# Altium PCB Plumo-2D.PcbDoc (part 1 of 2)
Units mil, origin at the board's own origin, x right, y up, seen from the top; angles counter-clockwise.
Board outline 2000 x 900 mil, 4 copper layers (Top Layer, Signal Layer 1, Signal Layer 2, Bottom Layer), stack 64.618 mil thick; 97 components, 64 nets, 298 pads, 130 vias.
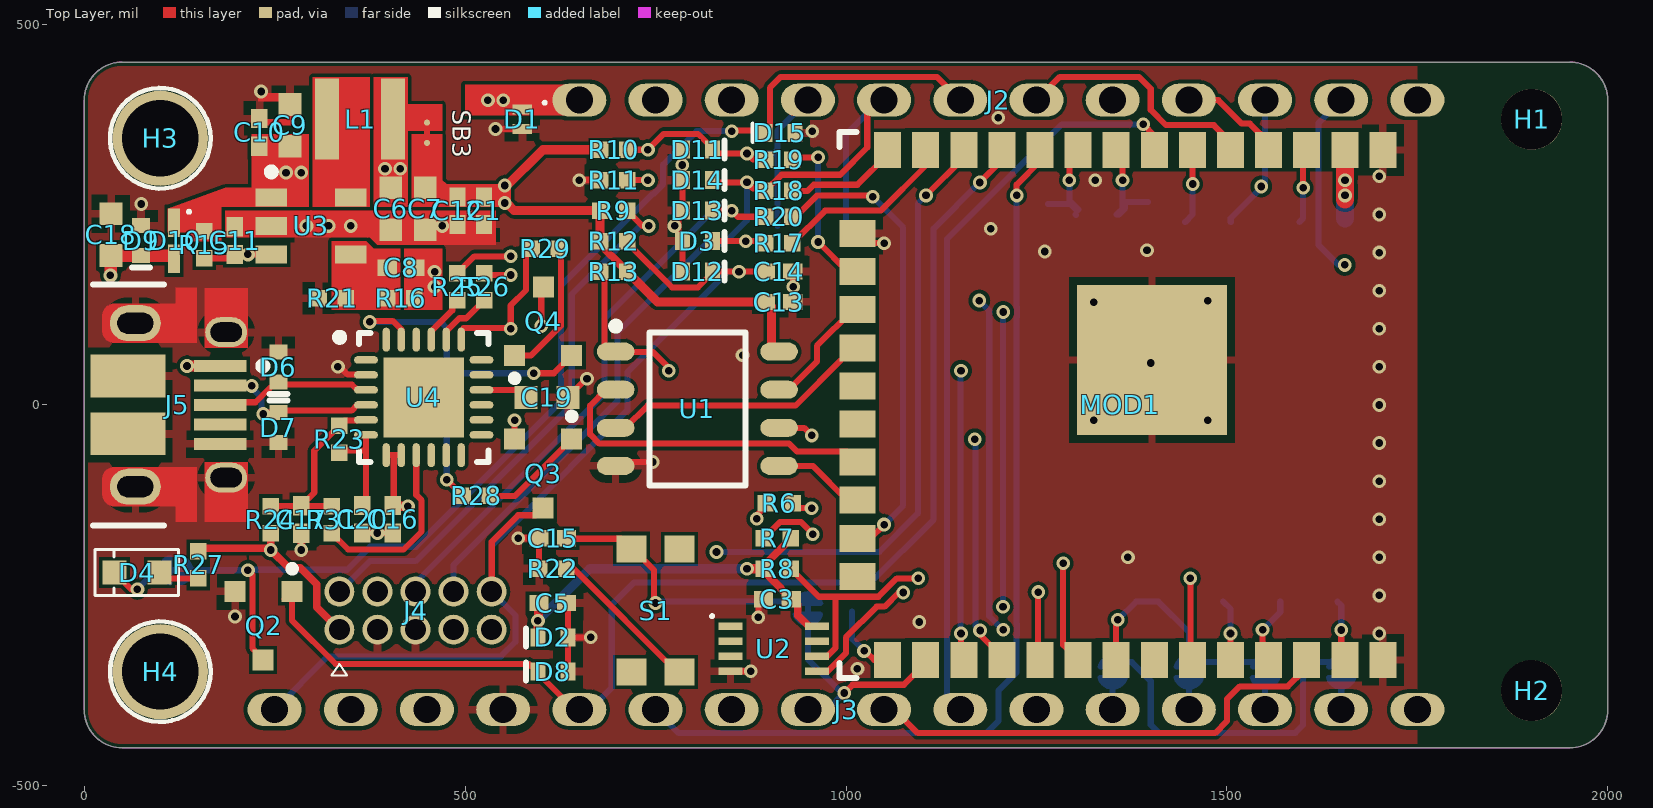
[diagram p0: Top Layer view]
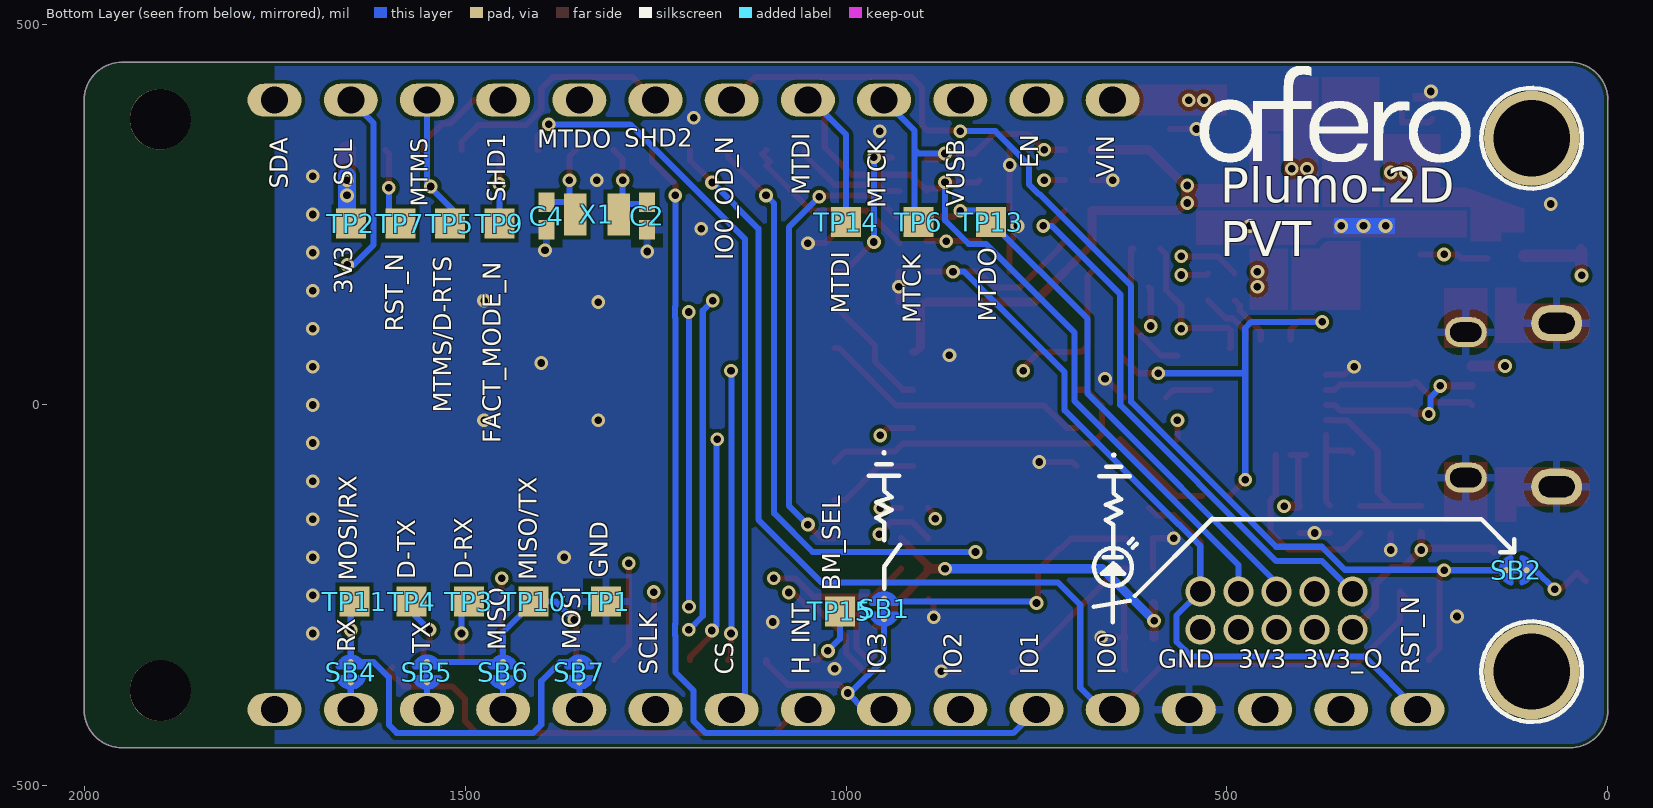
[diagram p1: Bottom Layer view, seen from below]
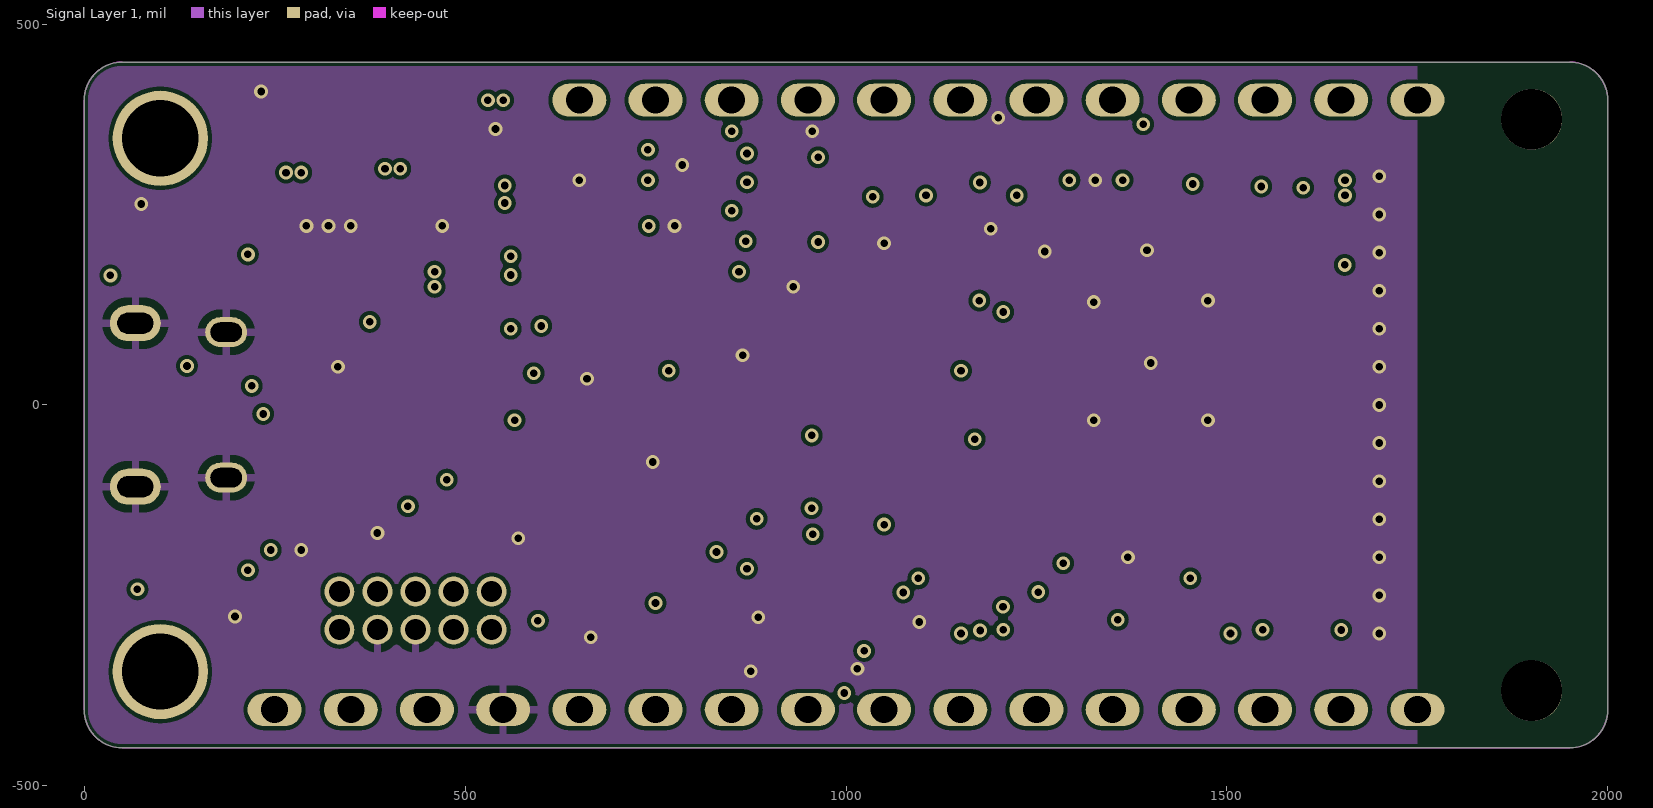
[diagram p2: Signal Layer 1]
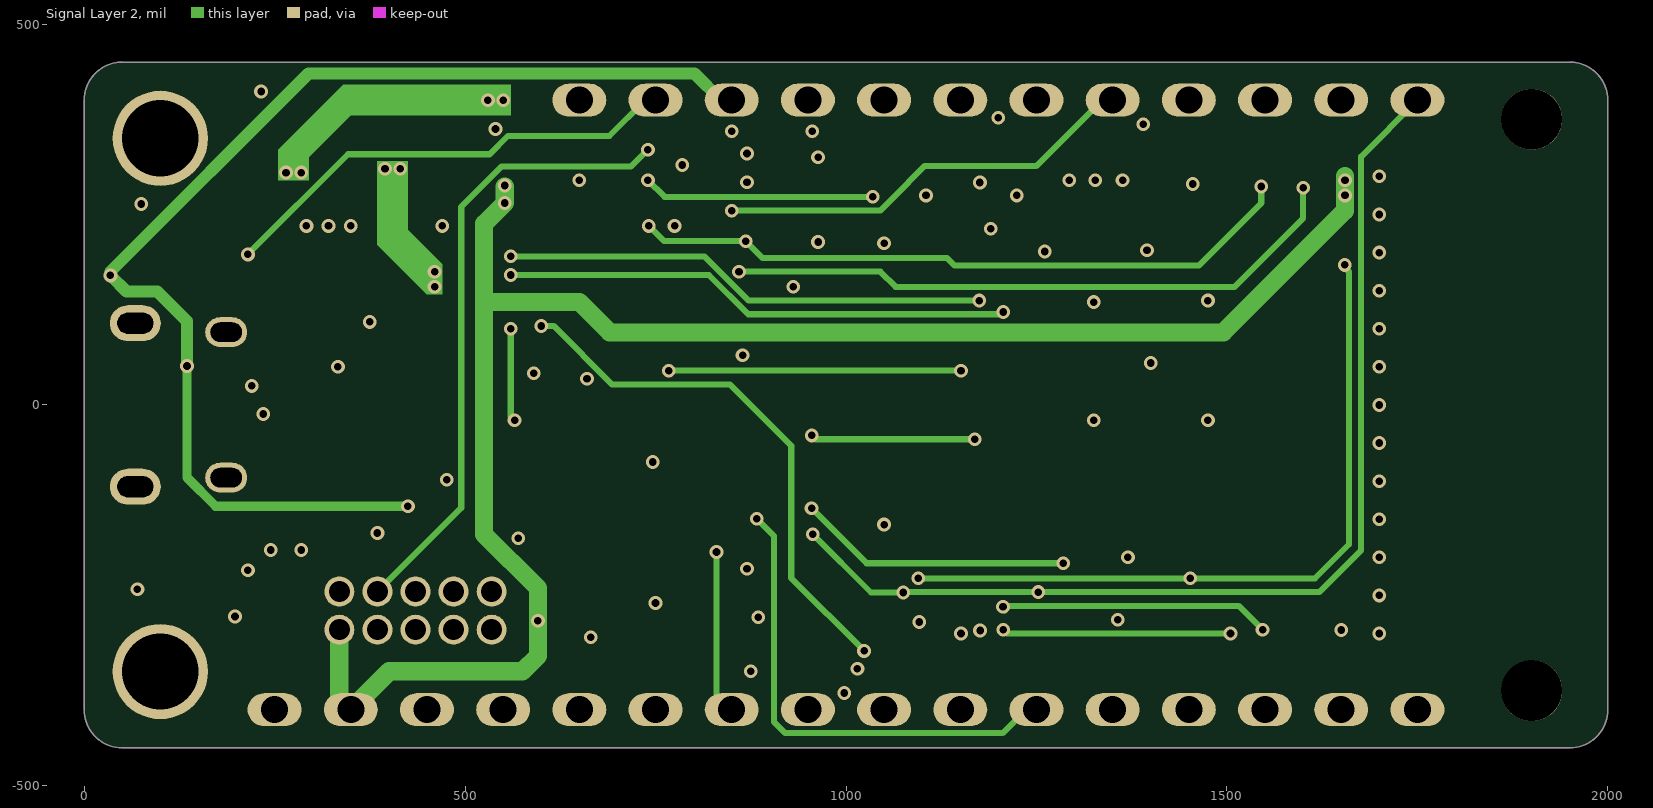
[diagram p3: Signal Layer 2]
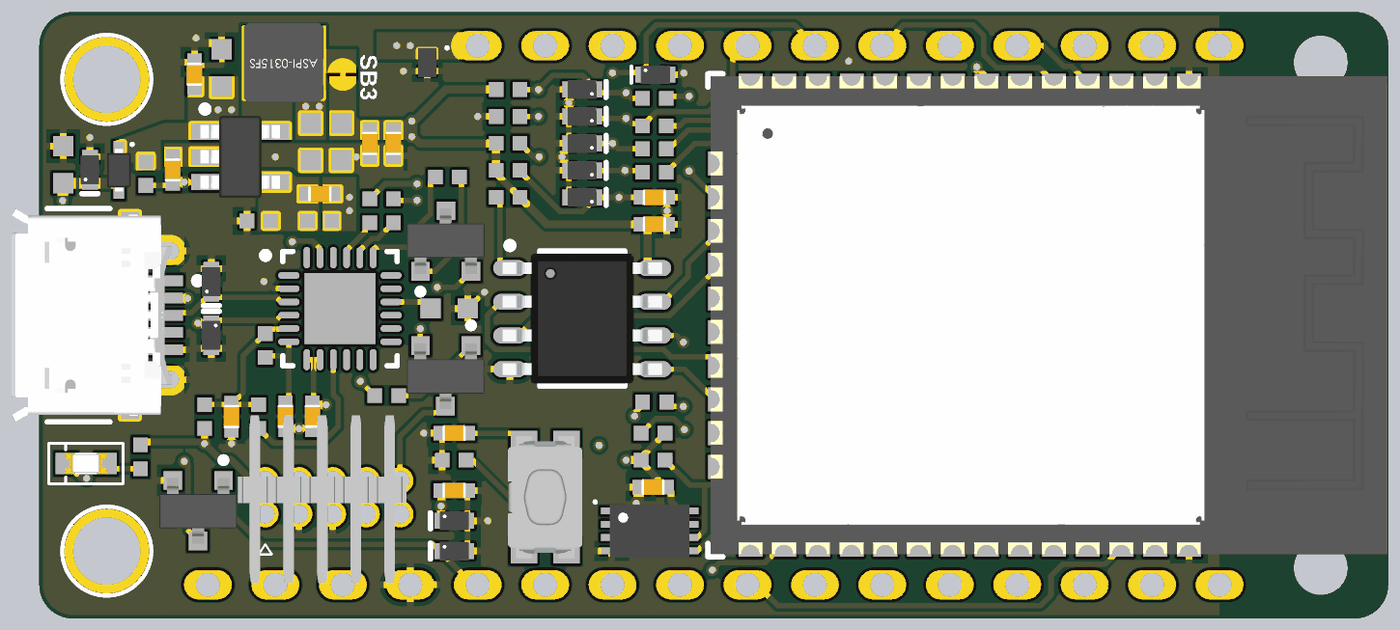
[diagram p5: 3D render of the assembled board from above, using the file's embedded part models]

## Layer stack, top to bottom
Top Solder: solder mask 0.4, Solder Resist, Dk 3.5
Top Layer: signal copper 1.4
Dielectric 1: core 6.7, FR408, Dk 4.2
Signal Layer 1: signal copper 0.709
Dielectric 3: prepreg 47, FR408, Dk 4.2
Signal Layer 2: signal copper 0.709
Dielectric 2: core 6.7, FR408, Dk 4.2
Bottom Layer: signal copper 1.4
Bottom Solder: solder mask 0.4, Solder Resist, Dk 3.5

## Board outline
0,-400 0,400 cw(c50,400) 50,450 1950,450 cw(c1950,400) 2000,400 2000,-400 cw(c1950,-400) 1950,-450 50,-450 cw(c50,-400)

## Design rules (kind name [scope] priority, off if disabled: settings)
Clearance [(Name <> 'H1-H') and (Name <> 'H2-H') vs (Name <> 'H1-H') and (Name <> 'H2-H')] p1: gap=5 ignorepadtopadclearanceinfootprint=FALSE
ComponentClearance [All] p1 off: gap=0 collisioncheckmode=3 verticalgap=0 showdistances=FALSE
DiffPairsRouting [All] p1 off: maxlimit=10 minlimit=5 mostfreqgap=5 toplayer_minwidth=8 toplayer_maxwidth=15 toplayer_prefwidth=8 midlayer1_minwidth=8 midlayer1_maxwidth=15 midlayer1_prefwidth=8 midlayer2_minwidth=8 midlayer2_maxwidth=15 midlayer2_prefwidth=8 bottomlayer_minwidth=8 bottomlayer_maxwidth=15 bottomlayer_prefwidth=8 maxuncoupledlength=500
MinimumSolderMaskSliver [All] p1 off: minsoldermaskwidth=10
PolygonConnect antenna-gnd-connect [IsVia vs IsPolygon] p1: connectstyle=Direct reliefconductorwidth=10 reliefentries=4 polygonreliefangle="90 Angle" airgapwidth=10
PolygonConnect PolygonConnect_1 [All] p2: connectstyle=Relief reliefconductorwidth=10 reliefentries=4 polygonreliefangle="90 Angle" airgapwidth=10
RoutingPriority "3V3 Routing" [InNet('3V3')] p1: routingpriority=89
RoutingPriority "GND Routing" [InNet('GND')] p2: routingpriority=90
RoutingVias [All] p1: holewidth=10 width=18 viastyle="Through Hole" minholewidth=10 minwidth=18 maxholewidth=20 maxwidth=40
SilkToSilkClearance [All] p1 off: silktosilkclearance=10
SilkToSolderMaskClearance [IsPad] p1 off: minsilkscreentomaskgap=10 clearancetoexposedcopper=TRUE
SolderMaskExpansion [All] p1: expansion=4
Width [All] p1: maxlimit=30 minlimit=5 preferedwidth=8
24 further rules are at their usual default settings.

## Classes and differential pairs
differential pair USB: +USB_P -USB_N

## Components (designator, comment, footprint, x,y, rotation, side; value= is the part's Value field where it differs from the comment)
C1 "100nF" 0402C-GENERIC 525,255 r270 top
C2 "18pF" 0402C-GENERIC 1261,248 r270 bottom
C3 "100nF" 0402C-GENERIC 910,-255 r180 top
C4 "18pF" 0402C-GENERIC 1393,248 r270 bottom
C5 "1uF" 0402C-GENERIC 615,-260 r0 top value=1u
C6 "10uF" 0603C-GENERIC 402.4,285 r270 top value=10u
C7 "10uF" 0603C-GENERIC 447.83,285 r270 top value=10u
C8 "20pF" 0402C-GENERIC 415.95,180 r180 top
C9 "2.2uF" 0603C-GENERIC 270.39,339.57 r90 top value=2u2
C10 "100nF" 0402C-GENERIC 230,357.68 r90 top
C11 "100nF" 0402C-GENERIC 197.83,215.71 r90 top
C12 "1uF" 0402C-GENERIC 490,255 r270 top value=1u
C13 "100nF" 0402C-GENERIC 912,135 r0 top
C14 "1uF" 0402C-GENERIC 912,175 r0 top value=1u
C15 "100nF" 0402C-GENERIC 615,-175 r180 top
C16 "1uF" 0402C-GENERIC 405,-150 r270 top value=1u
C17 "100nF" 0402C-GENERIC 285,-150.39 r270 top
C18 "4.7uF" 0603C-GENERIC 35.27,196 r90 top value=4u7
C19 "4.7uF" 0603C-GENERIC 580,10 r0 top value=4u7
C20 "1uF" 0402C-GENERIC 365,-150 r270 top value=1u
D1 "SP3118-01ETG" SOD882 575,375 r270 top
D2 "TPD1E05U06" SON70P100X45-2N 595.63,-305 r0 top
D3 "TPD1E05U06" SON70P100X45-2N 824.57,215 r180 top
D4 "Orange" 0603LED 99.06,-220 r180 top
D6 "TPD1E05U06" SON70P100X45-2N 255,30 r90 top
D7 "TPD1E05U06" SON70P100X45-2N 255,-10 r270 top
D8 "TPD1E05U06" SON70P100X45-2N 595.63,-350 r0 top
D9 "TPD1E05U06" SON70P100X45-2N 75,196.13 r90 top
D10 "NSR05T30XV2T5G" SOD-523 118,215.2 r270 top
D11 "TPD1E05U06" SON70P100X45-2N 824.57,335 r180 top
D12 "TPD1E05U06" SON70P100X45-2N 824.57,175 r180 top
D13 "TPD1E05U06" SON70P100X45-2N 824.57,255 r180 top
D14 "TPD1E05U06" SON70P100X45-2N 824.57,295 r180 top
D15 "TPD1E05U06" SON70P100X45-2N 893.58,357 r0 top
H1 "FEATHER-HOLE-NP" FEATHER-HOLE-NP 1900,375 r0 top
H2 "FEATHER-HOLE-NP" FEATHER-HOLE-NP 1900,-375 r0 top
H3 "FEATHER-HOLE-P" FEATHER-HOLE-P 100,350 r0 top
H4 "FEATHER-HOLE-P" FEATHER-HOLE-P 100,-350 r0 top
J2 "HDR-1x12" HDR-1X12 650,400 r0 top
J3 "HDR-1x16" HDR-1X16 1750,-400 r180 top
J4 "HDR-2x5" S9015E-05 435,-270 r0 top
J5 "10103594-0001LF" 10103594-0001LF 122,0 r180 top locked
L1 "10uH" ASPI-0315FS 319,375 r0 top
MOD1 "ESP32-WROOM-32D" ESP32-WROOM-32D 1359.95,0 r270 top locked
Q2 "2N7002" SOT23 273,-245 r270 top
Q3 "MMBT3904" SOT23 640,-45 r270 top
Q4 "MMBT3904" SOT23 565,65 r90 top
R6 "100" 0402R-GENERIC 912.28,-128.78 r0 top
R7 "4.7k" 0402R-GENERIC 910,-175 r180 top
R8 "4.7k" 0402R-GENERIC 910,-215 r0 top
R9 "100k" 0402R-GENERIC 695,255 r0 top
R10 "100k" 0402R-GENERIC 695,335 r0 top
R11 "NS" 0402R-GENERIC 695,295 r180 top
R12 "10k" 0402R-GENERIC 695,215 r180 top
R13 "10k" 0402R-GENERIC 695,175 r180 top
R15 "200K" 0402R-GENERIC 157.83,210.32 r270 top
R16 "680k" 0402R-GENERIC 415.55,140 r0 top
R17 "100" 0402R-GENERIC 912,212 r0 top
R18 "100" 0402R-GENERIC 912,281 r0 top
R19 "100" 0402R-GENERIC 912,322 r0 top
R20 "100" 0402R-GENERIC 912,247 r0 top
R21 "200k" 0402R-GENERIC 325.55,140 r0 top
R22 "100" 0402R-GENERIC 615,-215 r180 top
R23 "0" 0402R-GENERIC 335,-45 r270 top
R24 "NS" 0402R-GENERIC 245,-150.39 r90 top
R25 "1k" 0402R-GENERIC 490,155 r270 top
R26 "1k" 0402R-GENERIC 525,155 r270 top
R27 "1k" 0402R-GENERIC 150,-210 r90 top
R28 "10k" 0402R-GENERIC 515,-119.31 r0 top
R29 "10k" 0402R-GENERIC 605,205 r0 top
R31 "4.7k" 0402R-GENERIC 325,-150.39 r90 top
S1 "KMR231NGLFS" KMR231NGLFS 750,-270 r270 top locked
SB1 "Solderbridge" SBNC 950,-267.64 r90 bottom net-tie
SB2 "Solderbridge" SBNC 120,-216.91 r180 bottom net-tie
SB3 "Solderbridge" SBNC 450.1,357.28 r90 top net-tie
SB4 "Solderbridge" SBNC 1650,-350.71 r90 bottom net-tie
SB5 "Solderbridge" SBNC 1550,-350.71 r90 bottom net-tie
SB6 "Solderbridge" SBNC 1450,-350.71 r90 bottom net-tie
SB7 "Solderbridge" SBNC 1350,-350.71 r90 bottom net-tie
TP1 "TP1MM" TP1MM 1315,-258 r90 bottom
TP2 "TP1MM" TP1MM 1650,238 r90 bottom
TP3 "TP1MM" TP1MM 1495,-258 r90 bottom
TP4 "TP1MM" TP1MM 1570,-258 r90 bottom locked
TP5 "TP1MM" TP1MM 1520,238 r90 bottom
TP6 "TP1MM" TP1MM 905,240 r90 bottom
TP7 "TP1MM" TP1MM 1585,238 r90 bottom locked
TP9 "TP1MM" TP1MM 1455,238 r90 bottom
TP10 "TP1MM" TP1MM 1410,-258 r90 bottom
TP11 "TP1MM" TP1MM 1645,-258 r90 bottom
TP13 "TP1MM" TP1MM 810,240 r90 bottom
TP14 "TP1MM" TP1MM 1000,240 r90 bottom
TP15 "TP1MM" TP1MM 1008,-271 r90 bottom locked
U1 "IPS6404L-SQ" IPUS.PSRAM 805,-5 r0 top
U2 "ATECC508A" SON50P300X60-8N 905,-320 r0 top
U3 "XC9264B755MR" SOT95P275X130-5N 297.83,235 r0 top
U4 "CP2104" CP2104 445.79,9.84 r0 top locked
X1 "32.768kHz" ABS06 1355.41,250 r180 bottom

## Footprints (in the part's own frame and the unit in brackets; to place one, negate y for a bottom-side part, rotate by r counter-clockwise, add the part's x,y. Pads: shape width x height; smd on the part's side, far side on the other; paste and mask are expansions set on the pad)
0402C-GENERIC [mm] "Chip Capacitor, 2-Leads, Body 1.00x0.50mm, IPC High Density"
  rect 0.64x0.54 smd: 1(-0.46,0) 2(0.46,0)
  body extent -0.45,-0.3 0.45,0.3, height 0.55
0402R-GENERIC [mm] "Chip Resistor, 2-Leads, Body 1.00x0.50mm, IPC Medium Density"
  rect 0.55x0.55 smd: 1(-0.45,0) 2(0.45,0)
  body extent -0.53,-0.27 0.53,0.28, height 0.4
0603C-GENERIC [mil] "CAPACITOR 0603"
  rect 30x30 smd: 1(0,0) 2(55,0)
  body extent -4,-15 59,15, height 19
0603LED [mm] "0603 LED"
  rect 0.8x0.8 smd: A(0,0) K(1.5,0)
  silkscreen extent -0.64,-0.76 2.16,0.76, body extent -0.04,-0.4 1.56,0.4, height 0.6
10103594-0001LF [mm] "USB Micro B"
  rect 1.75x0.4 smd: 1(-1.435,-1.3) 2(-1.435,-0.65) 3(-1.435,0) 4(-1.435,0.65) 5(-1.435,1.3)
  oval 1.4x1 hole 0.65 slot 1.05 at 0 deg: 6(-1.64,-2.425) 7(-1.64,2.425)
  oval 1.7x1.2 hole 0.7 slot 1.2 at 0 deg: 8(1.39,2.725) 9(1.39,-2.725)
  rect 2.5x1.425 smd: 10(1.64,-0.963) 11(1.64,0.963)
  Top Layer region: -2.37,3.9 -2.37,1.9 -0.91,1.9 -0.91,3.9
  Top Layer region: -0.91,-3.9 -0.91,-1.9 -2.37,-1.9 -2.37,-3.9
  Top Layer region: 0.04,3.375 2.09,3.375 2.129,3.373 2.167,3.369 2.185,3.365 2.203,3.359 2.239,3.348 2.277,3.329 2.312,3.308 2.344,3.284 2.374,3.258 2.401,3.227 2.426,3.194 2.446,3.158 2.464,3.121 2.477,3.08 2.483,3.049 2.488,3.012 2.49,2.975 2.49,2.475 2.488,2.432 2.481,2.391 2.471,2.351 2.456,2.312 2.439,2.28 2.421,2.249 2.396,2.217 2.37,2.19 2.342,2.164 2.312,2.143 2.277,2.121 2.241,2.105 2.209,2.093 2.192,2.088 2.175,2.084 2.155,2.08 2.134,2.076 2.112,2.075 2.09,2.075 0.04,2.075 -0.66,2.075 -0.66,3.9 0.04,3.9
  Top Layer region: 0.04,-3.375 2.09,-3.375 2.129,-3.373 2.167,-3.369 2.185,-3.365 2.203,-3.359 2.239,-3.348 2.277,-3.329 2.312,-3.308 2.344,-3.284 2.374,-3.258 2.401,-3.227 2.426,-3.194 2.446,-3.158 2.464,-3.121 2.477,-3.08 2.483,-3.049 2.488,-3.012 2.49,-2.975 2.49,-2.475 2.488,-2.432 2.482,-2.391 2.471,-2.351 2.456,-2.312 2.439,-2.28 2.421,-2.249 2.397,-2.217 2.37,-2.19 2.342,-2.164 2.312,-2.143 2.277,-2.121 2.241,-2.105 2.209,-2.093 2.192,-2.088 2.175,-2.084 2.155,-2.08 2.134,-2.076 2.112,-2.075 2.09,-2.075 0.04,-2.075 -0.66,-2.075 -0.66,-3.9 0.04,-3.9
  silkscreen extent -2.99,-4.02 2.8,4.02, body extent -1.88,-4.02 4.15,4.02, height 2.9
ABS06 [mm]
  rect 0.75x1.4 smd: 1(0,0) 2(1.45,0)
  body extent -0.3,-0.61 1.7,0.61, height 0.61
ASPI-0315FS [mm] "LOW PROFILE SHIELDED SMD CHIP POWER INDUCTOR"
  rect 0.8x2.7 smd: 1(0,0) 2(2.2,0)
  body extent -0.4,-1.5 2.6,1.5, height 1.51
CP2104 [mm] "CP2104 4x4mm QFN"
  oval 0.8x0.25 smd: 1(-1.925,1.25) 2(-1.925,0.75) 3(-1.925,0.25) 4(-1.925,-0.25) 5(-1.925,-0.75) 6(-1.925,-1.25) 13(1.925,-1.25) 14(1.925,-0.75) 15(1.925,-0.25) 16(1.925,0.25) 17(1.925,0.75) 18(1.925,1.25)
  oval 0.25x0.8 smd: 7(-1.25,-1.925) 8(-0.75,-1.925) 9(-0.25,-1.925) 10(0.25,-1.925) 11(0.75,-1.925) 12(1.25,-1.925) 19(1.25,1.925) 20(0.75,1.925) 21(0.25,1.925) 22(-0.25,1.925) 23(-0.75,1.925) 24(-1.25,1.925)
  rect 2.68x2.68 smd: 25(0,0)
  silkscreen extent -2.93,-2.15 2.15,2.15, body extent -2,-2 2,2, height 0.8
ESP32-WROOM-32D [mm]
  rect 1.2x0.9 smd: 1(-8.5,8.755) 2(-8.5,7.485) 3(-8.5,6.215) 4(-8.5,4.945) 5(-8.5,3.675) 6(-8.5,2.405) 7(-8.5,1.135) 8(-8.5,-0.135) 9(-8.5,-1.405) 10(-8.5,-2.675) 11(-8.5,-3.945) 12(-8.5,-5.215) 13(-8.5,-6.485) 14(-8.5,-7.755) 25(8.5,-7.755) 26(8.5,-6.485) 27(8.5,-5.215) 28(8.5,-3.945) 29(8.5,-2.675) 30(8.5,-1.405) 31(8.5,-0.135) 32(8.5,1.135) 33(8.5,2.405) 34(8.5,3.675) 35(8.5,4.945) 36(8.5,6.215) 37(8.5,7.485) 38(8.5,8.755)
  rect 0.9x1.2 smd: 15(-5.715,-8.755) 16(-4.445,-8.755) 17(-3.175,-8.755) 18(-1.905,-8.755) 19(-0.635,-8.755) 20(0.635,-8.755) 21(1.905,-8.755) 22(3.175,-8.755) 23(4.445,-8.755) 24(5.715,-8.755)
  rect 5x5 smd: 39(-1.5,1.055)
  silkscreen extent -9.1,-9.37 9.1,-8.8, body extent -9,-9.27 9,16.23, height 3.26
FEATHER-HOLE-NP [mil] "Feather Board Hole not Plated"
  round 80 hole 80 unplated paste-39.37 mask-39.37: H(0,0)
FEATHER-HOLE-P [mil] "Feather Board Hole Plated"
  round 125 hole 100 paste-39.37: H(0,0)
  silkscreen extent -66,-66 66,66
HDR-1X12 [mm] "Machine Pin Vertical Male Header 12 pins"
  oval 1.8x1.1 hole 0.9: 1(0,0) 2(2.54,0) 3(5.08,0) 4(7.62,0) 5(10.16,0) 6(12.7,0) 7(15.24,0) 8(17.78,0) 9(20.32,0) 10(22.86,0) 11(25.4,0) 12(27.94,0)
HDR-1X16 [mm] "Machine Pin Vertical Male Header 18 pins"
  oval 1.8x1.1 hole 0.9: 1(0,0) 2(2.54,0) 3(5.08,0) 4(7.62,0) 5(10.16,0) 6(12.7,0) 7(15.24,0) 8(17.78,0) 9(20.32,0) 10(22.86,0) 11(25.4,0) 12(27.94,0) 13(30.48,0) 14(33.02,0) 15(35.56,0) 16(38.1,0)
IPUS.PSRAM [mm] "SOP, 8-Leads, Body 4.90x3.90mm, Pitch 1.27mm, IPC Medium Density"
  oval 1.25x0.6 smd: 1(-2.725,1.905) 2(-2.725,0.635) 3(-2.725,-0.635) 4(-2.725,-1.905) 5(2.725,-1.905) 6(2.725,-0.635) 7(2.725,0.635) 8(2.725,1.905)
  silkscreen extent -2.85,-2.55 1.6,2.88, body extent -3,-2.45 3,2.45, height 1.7
KMR231NGLFS [mm] "Microminiature Tact Switch for SMT"
  rect 0.9x1 smd: 1(-2.05,-0.8) 2(-2.05,0.8) 3(2.05,-0.8) 4(2.05,0.8)
  body extent -2.3,-1.4 2.3,1.4, height 1.93
S9015E-05 [mm] ".050\" Dual Row Male Header"
  round 1 hole 0.7: 1(-2.54,-0.635) 2(-2.54,0.635) 3(-1.27,-0.635) 4(-1.27,0.635) 5(0,-0.635) 6(0,0.635) 7(1.27,-0.635) 8(1.27,0.635) 9(2.54,-0.635) 10(2.54,0.635)
  silkscreen extent -2.79,-2.16 -2.29,-1.78, body extent -3.17,-1.7 3.17,1.7, height 4.01
SBNC [mm] "Solderbridge, Normally Closed"
  round 0.2 smd paste-10: 1(-0.338,0) 2(0.338,0)
  Top Layer region: -0.102,-0.432 -0.178,-0.505 -0.296,-0.467 -0.361,-0.424 -0.434,-0.351 -0.488,-0.292 -0.546,-0.193 -0.574,-0.099 -0.569,0.122 -0.544,0.193 -0.46,0.33 -0.376,0.411 -0.284,0.469 -0.183,0.5 -0.132,0.483 -0.102,0.43
  Top Layer region: 0.102,0.432 0.178,0.505 0.296,0.467 0.361,0.424 0.434,0.351 0.488,0.292 0.546,0.193 0.574,0.099 0.569,-0.122 0.544,-0.193 0.46,-0.33 0.376,-0.411 0.284,-0.469 0.183,-0.5 0.132,-0.483 0.102,-0.43
  Top Layer lines w0.152: -0.178,-0.431 cw(c-0.068,0) -0.178,0.431 ; 0.178,-0.431 ccw(c0.068,0) 0.178,0.431
  Top Layer lines w0.203: -0.338,0 0.338,0
SOD882 [mm] "SOD 2-Leads, Body 0.60x1.00mm, Pitch 0.65mm, IPC Medium Density"
  rect 0.325x0.65 smd: 1(-0.325,0) 2(0.325,0)
  silkscreen extent -0.6,0.7 -0.5,0.8, body extent -0.55,-0.35 0.55,0.35, height 0.6
SOD-523 [mm] "SODFL, 2-Leads, Body 0.80x1.60mm, IPC Medium Density"
  rect 0.95x0.4 smd: 1(-0.6,0) 2(0.6,0)
  silkscreen extent -1.02,0.45 -0.93,0.55, body extent -0.8,-0.45 0.8,0.45, height 0.7
SON50P300X60-8N [mm] "SON, 8-Leads, Body 2.00x3.00mm, Pitch 0.50mm, IPC Medium Density"
  rect 0.8x0.25 smd: 1(-1.44,0.75) 2(-1.44,0.25) 3(-1.44,-0.25) 4(-1.44,-0.75) 5(1.44,-0.75) 6(1.44,-0.25) 7(1.44,0.25) 8(1.44,0.75)
  silkscreen extent -2.1,1.04 -2,1.14, body extent -1.5,-1 1.5,1, height 0.6
SON70P100X45-2N [mm] "SON, 2-Leads, Body 0.60x1.00mm, Pitch 0.70mm, IPC Medium Density"
  rect 0.5x0.6 smd: 1(0,0) 2(1,0)
  silkscreen extent -0.4,-0.3 -0.4,0.3, body extent -0.05,-0.35 1.05,0.35, height 0.45
SOT23 [mm] "SOT23"
  rect 0.7x0.7 smd: 1(0,0) 2(0,-1.905) 3(2.286,-0.965)
  silkscreen extent -0.86,-0.1 -0.66,0.1, body extent -0.09,-2.41 2.39,0.51, height 1.03
SOT95P275X130-5N [mm] "SOT23, 5-Leads, Body 2.90x2.75mm, Pitch 0.95mm, IPC Medium Density"
  rect 1.05x0.6 smd: 1(-1.325,0.95) 2(-1.325,0) 3(-1.325,-0.95) 4(1.325,-0.95) 5(1.325,0.95)
  silkscreen extent -1.45,1.68 -1.2,1.92, body extent -1.5,-1.55 1.5,1.55, height 1.3
TP1MM [mm] "1mm test point"
  rect 1x1 smd paste-1: 1(0,0)

## Part data
C1 C3 C10 C11 C13 C15 C17: library part 0402C-100n, "Capacitor 100nF X5R 50V 10% 0402", Case/Package=0402, Case Code (Metric)=1005, Dielectric=X5R, Manufacturer=Murata, Manufacturer Part Number=GRM155R61H104KE19D, Max Operating Temperature=85°C, Min Operating Temperature=-55°C, Supplier Part Number 1=81-GRM155R61H104KE9D, Tolerance=10%, Voltage=50V, Capacitance=100nF, Case Code (Imperial)=0402, Depth=0.5mm, Height=0.5mm, item_number=E-CAP-00090-00, Lead Free="Lead Free", Length=1mm, Mount="Surface Mount", Packaging="Tape and Reel", Pricing 1="1=0.1, 10=0.068, 50=0.068, 100=0.03, 1000=0.017, 10000=0.011 (USD)", REACH SVHC="No SVHC", Stock 1=727844, Supplier 1=Mouser, Thickness=0.022inch, Voltage Rating=50V, Voltage Rating (DC)=50V, Width=0.02inch
C2 C4: library part 0402C-18p, "Capacitor, 18pF, 50V, 1%, C0G", Case/Package=0402, Case Code (Metric)=1005, Dielectric=C0G, Manufacturer=Murata, Manufacturer Part Number=GJM1555C1H180FB01D, Max Operating Temperature=125°C, Min Operating Temperature=-55°C, Package Quantity=10000, Tolerance=1%, Voltage Rating=50V, Capacitance=18pF, Case Code (Imperial)=0402, Depth=0.5mm, Height=0.5mm, item_number=E-CAP-00110-00, Lead Free="Lead Free", Length=1mm, Mount="Surface Mount", Packaging="Tape and Reel", Radiation Hardening=No, REACH SVHC="No SVHC", Termination=SMD/SMT, Thickness=0.022inch, Voltage Rating (DC)=50V, Width=0.02inch
C5 C12 C14 C16 C20: library part 0402C-1u, "Capacitor 1uF X5R 6.3V 20% 0402", Capacitance - nF="1000 nF", Case Code - in=0402, Case Code - mm=1005, Dielectric=X5R, Manufacturer=SEM, Manufacturer Part Number=CL05A105KQ5NNNC, Maximum Operating Temperature="+ 85 C", Minimum Operating Temperature="- 55 C", Package / Case="0402 (1005 metric)", Tolerance="20 %", Voltage Rating DC="6.3 VDC", Brand=SEM, Capacitance=1uF, Category="Multilayer Ceramic Capacitors MLCC - SMD/SMT", Height="0.5 mm", item_number=E-CAP-00020-00, Length="1 mm", Minimum Order Quantity=1, Packaging="Cut Tape", Product="General Type MLCCs", Reeling=True, RoHS="RoHS Compliant", RoHS - Mouser=Y, Series=GRM, Standard Pack Qty=50000, Termination Style=SMD/SMT, Type="Chip Monolithic Ceramic Capacitor", Width="0.5 mm"
C6 C7: library part 0603C-10u, "Capacitor 10uF X5R 16V 20% 0603", Case/Package=0603, Case Code (Metric)=1608, Dielectric=X5R, Manufacturer=Murata, Manufacturer Part Number=GRM188R61C106MA73D, Max Operating Temperature=85°C, Min Operating Temperature=-55°C, Package Quantity=4000, Tolerance=20%, Voltage Rating=16V, Capacitance=10uF, Case Code (Imperial)=0603, Depth=0.8mm, Height=1mm, item_number=E-CAP-00100-00, Lead Free="Lead Free", Length=1.6mm, Material=Ceramic, Mount="Surface Mount", Packaging="Tape and Reel", REACH SVHC="No SVHC", Termination=SMD/SMT, Thickness=0.037inch, Voltage Rating (DC)=16V, Weight=0.000222oz, Width=0.8mm
C8: library part 0402C-20p, "Capacitor 20pF C0G 50V 1% 0402", Case/Package=0402, Case Code (Metric)=1005, Dielectric=C0G, Manufacturer=Murata, Manufacturer Part Number=GJM1555C1H200FB01D, Max Operating Temperature=125°C, Min Operating Temperature=-55°C, Package Quantity=10000, Tolerance=1%, Voltage Rating=50V, Capacitance=20pF, Case Code (Imperial)=0402, Depth=0.5mm, Height=0.5mm, item_number=E-CAP-00107-00, Lead Free="Lead Free", Length=1mm, Mount="Surface Mount", Packaging="Tape and Reel", Radiation Hardening=No, REACH SVHC="No SVHC", Termination=SMD/SMT, Thickness=0.022inch, Voltage Rating (DC)=50V, Width=0.02inch
C9: library part 0603C-2u2, "Capacitor 2.2uF X5R 25V 10% 0603", Case/Package=0603, Case Code (Metric)=1608, Dielectric=X5R, Manufacturer=Murata, Manufacturer Part Number=GRM188R61E225KA12D, Max Operating Temperature=85°C, Min Operating Temperature=-55°C, Package Quantity=4000, Tolerance=10%, Voltage Rating=25V, Capacitance=2.2uF, Case Code (Imperial)=0603, Depth=0.8mm, Height=0.9mm, item_number=E-CAP-00108-00, Lead Free="Lead Free", Length=1.6mm, Material=Ceramic, Mount="Surface Mount", Packaging="Tape and Reel", REACH SVHC="No SVHC", Termination=SMD/SMT, Thickness=0.037inch, Voltage Rating (DC)=25V, Weight=0.000222oz, Width=0.8mm
C18 C19: library part 0603C-4u7, "Capacitor 4.7uF X5R 10V 10% 0603", Case/Package=0603, Case Code (Metric)=1608, Dielectric=X5R, Manufacturer="Taiyo Yuden", Manufacturer Part Number=LMK107BJ475KA-T, Max Operating Temperature=85°C, Min Operating Temperature=-55°C, Package Quantity=4000, Tolerance=10%, Voltage Rating=10V, Capacitance=4.7uF, Case Code (Imperial)=0603, Depth=0.8mm, Height=0.9mm, item_number=E-CAP-00066-00, Lead Free="Lead Free", Length=1.6mm, Material=Ceramic, Mount="Surface Mount", Packaging="Tape and Reel", REACH SVHC="No SVHC", Termination=SMD/SMT, Thickness=0.035inch, Voltage Rating (DC)=10V, Weight=0.000222oz, Width=0.8mm
D1: "Diode TVS", Capacitance=0.3pF, Clamping Voltage=38V, Leakage Current=50nA, Manufacturer=Littelfuse, Max Operating Temperature=125°C, Max Power Dissipation=76W, Min Breakdown Voltage=-, Min Operating Temperature=-40°C, Operating Supply Voltage=18V, Package Quantity=10000, Peak Pulse Current=2A, Power Line Protection=Yes, Direction=Bidirectional, Element Configuration=Single, item_number=E-DIO-00011-00, Lead Free="Lead Free", Length=1mm, Manufacturer Part Number=SP3118-01ETG, Mount="Surface Mount", Number of Bidirectional Channels=1, Number of Channels=1, Number of Pins=2, Packaging="Tape and Reel", Peak Pulse Power=76W, Polarity=Bidirectional, Radiation Hardening=No, REACH SVHC="No SVHC", Reverse Standoff Voltage=18V, Termination=SMD/SMT, Working Voltage=18V
D2 D3 D6 D7 D8 D9 D11 D12 D13 D14 D15: "Diode TVS", Breakdown Voltage=6.5V, Capacitance=0.5pF, Clamping Voltage=14V, Leakage Current=10nA, Manufacturer="Texas Instruments", Manufacturer Part Number=TPD1E05U06DPYR, Max Operating Temperature=125°C, Max Power Dissipation=40W, Min Breakdown Voltage=6V, Min Operating Temperature=-40°C, Operating Supply Voltage=5.5V, Package Quantity=10000, Peak Pulse Current=2.5A, Power Line Protection=Yes, Supplier Part Number 1=296-39341-1-ND, ComponentLink1Description=https://datasheet.ciiva.com/12545/tpd1e05u06-224685-12545140.pdf, ComponentLink1URL=https://datasheet.ciiva.com/12545/tpd1e05u06-224685-12545140.pdf, ComponentLink2Description=https://datasheet.ciiva.com/26918/getdatasheetpartid-700473-26918022.pdf, ComponentLink2URL=https://datasheet.ciiva.com/26918/getdatasheetpartid-700473-26918022.pdf, ComponentLink3Description=https://datasheet.ciiva.com/6574/tpd1e05u06-6574667.pdf, ComponentLink3URL=https://datasheet.ciiva.com/6574/tpd1e05u06-6574667.pdf, Direction=Unidirectional, Element Configuration=Single, Interface=LVDS,USB,Ethernet,HDMI,PCIe,SATA, item_number=E-DIO-00008-00, Lead Free="Lead Free", Length=1.1mm, Mount="Surface Mount", Number of Bidirectional Channels=1, Number of Channels=1, Number of Pins=2, Packaging="Tape and Reel", Peak Pulse Power=40W, Polarity=Bidirectional, Pricing 1="1=0.5, 10=0.372, 100=0.2107, 500=0.1395, 1000=0.107 (USD)", Radiation Hardening=No, REACH SVHC="No SVHC", Reverse Standoff Voltage=5.5V, Stock 1=161045, Supplier 1=Digi-Key, Termination=SMD/SMT, Working Voltage=5.5V
D4: library part LED_0603_O, "LED Orange 0603", Case/Package=0603, Case Code (Metric)=1608, Colour=Red,Orange, Forward Current=30mA, Forward Voltage=2V, Lens Colour=Colorless, Manufacturer="Vishay Lite-On", Manufacturer Part Number=LTST-C190KAKT, Max Operating Temperature=85°C, Min Operating Temperature=-55°C, Package Quantity=1, Power Dissipation=75mW, Reverse Voltage=5V, Supplier Part Number 1=160-1433-1-ND, Test Current=20mA, Case Code (Imperial)=0603, ComponentLink1Description=https://datasheet.ciiva.com/24120/ltst-c190kakt-267511-24120611.pdf, ComponentLink1URL=https://datasheet.ciiva.com/24120/ltst-c190kakt-267511-24120611.pdf, ComponentLink2Description=https://datasheet.ciiva.com/26937/getdatasheetpartid-257177-26937956.pdf, ComponentLink2URL=https://datasheet.ciiva.com/26937/getdatasheetpartid-257177-26937956.pdf, ComponentLink3Description=https://datasheet.ciiva.com/2110/ltst-c150-170-190kxkt-2110261.pdf, ComponentLink3URL=https://datasheet.ciiva.com/2110/ltst-c150-170-190kxkt-2110261.pdf, ComponentLink4Description=https://datasheet.ciiva.com/2110/ltst-c150-170-190kxkt-2110262.pdf, ComponentLink4URL=https://datasheet.ciiva.com/2110/ltst-c150-170-190kxkt-2110262.pdf, ComponentLink5Description=https://datasheet.ciiva.com/2110/ltst-c150-170-190kxkt-2110263.pdf, ComponentLink5URL=https://datasheet.ciiva.com/2110/ltst-c150-170-190kxkt-2110263.pdf, Depth=1.6mm, Dominant Wavelength=615nm, Height=0.8mm, Illumination Colour=Orange, item_number=E-LED-00012-00, Lead Free="Lead Free", Length=1.6mm, Lens Style=Flat,Diffused,Colorless,Rectangular, Lens Transparency=Clear, Luminous Intensity=54mcd, Mount="Surface Mount", Number of Elements=1, Number of LEDs=1, Number of Pins=2, Orientation="Top View", Packaging="Tape and Reel", Pricing 1="1=0.41, 10=0.296, 25=0.2268, 100=0.148, 250=0.1085, 500=0.0921, 1000=0.0757 (USD)", Radiation Hardening=No, Stock 1=60967, Supplier 1=Digi-Key, Viewing Angle=130°, Wavelength=621nm, Width=0.8mm
D10: "Diode Schottky 30V 0.5A SOD523", Leakage Current=170uA/30V, Manufacturer="On Semiconductor", Max Operating Temperature=150°C, Max Reverse Voltage (DC)=30V, Min Operating Temperature=-55°C, Package / Case=SOD523, Package Quantity=10000, Peak Pulse Current=1.5A, Direction=Unidirectional, Element Configuration=Single, item_number=E-DIO-00012-00, Lead Free="Lead Free", Length=1.6mm, Manufacturer Part Number=NSR05T30XV2T5G, Mount="Surface Mount", Number of Channels=1, Number of Pins=2, Packaging="Tape and Reel", Radiation Hardening=No, REACH SVHC="No SVHC", Termination=SMD/SMT, Voltage Rating (DC)=30V
H1 H2: "0.09\" Unplated Hole"
H3 H4: "0.1\" Plated Hole"
J2: "0.1\" header 12 positions", Manufacturer=Molex, Manufacturer Part Number=22032121, item_number=M-CON-00086-00
J3: "0.1\" header 16 positions", Manufacturer=Molex, Manufacturer Part Number=22032161, item_number=M-CON-00087-00
J4: ".050 Male Header 2x5", Manufacturer Part Number=GRPB052VWVN-RC, item_number=M-CON-00016-00
J5: "Connector MICRO USB B", Current Rating=1.8A, Insulation Resistance=1GR, Manufacturer="Amphenol FCI", Max Operating Temperature=85°C, Max Voltage Rating (AC)=100V, Min Operating Temperature=-55°C, Package Quantity=1500, Supplier Part Number 1=609-4050-1-ND, ComponentLink1Description=https://datasheet.ciiva.com/8015/10103594-8015248.pdf, ComponentLink1URL=https://datasheet.ciiva.com/8015/10103594-8015248.pdf, ComponentLink2Description=https://datasheet.ciiva.com/11731/0900766b80ed1ae4-11731328.pdf, ComponentLink2URL=https://datasheet.ciiva.com/11731/0900766b80ed1ae4-11731328.pdf, ComponentLink3Description=https://datasheet.ciiva.com/14618/70236822-14618885.pdf, ComponentLink3URL=https://datasheet.ciiva.com/14618/70236822-14618885.pdf, ComponentLink4Description=https://datasheet.ciiva.com/22654/1469075-22654519.pdf, ComponentLink4URL=https://datasheet.ciiva.com/22654/1469075-22654519.pdf, ComponentLink5Description=https://datasheet.ciiva.com/851/10103594-851115.pdf, ComponentLink5URL=https://datasheet.ciiva.com/851/10103594-851115.pdf, ComponentLink6Description=https://datasheet.ciiva.com/5726/10103594-5726971.pdf, ComponentLink6URL=https://datasheet.ciiva.com/5726/10103594-5726971.pdf, ComponentLink7Description=https://datasheet.ciiva.com/851/10103594-851116.pdf, ComponentLink7URL=https://datasheet.ciiva.com/851/10103594-851116.pdf, ComponentLink8Description=https://datasheet.ciiva.com/851/10103594-851117.pdf, ComponentLink8URL=https://datasheet.ciiva.com/851/10103594-851117.pdf, Connector Type=USB,Receptacle, Contact Material="Copper,Copper Alloy", Contact Plating=Gold, Features=Shielded, Gender=Receptacle, Housing Material=Thermoplastic, item_number=M-CON-00011-00, Lead Free="Lead Free", Length=8.04mm, Manufacturer Part Number=10103594-0001LF, Mount="Surface Mount,Horizontal", Number of Contacts=5, Number of Ports=1, Number of Terminals=5, Orientation="Right Angle", Packaging="Tape and Reel", Pitch=0.65mm, Pricing 1="1=0.82, 10=0.721, 25=0.6788, 50=0.6504, 100=0.6221, 250=0.5655, 500=0.509 (USD)", Radiation Hardening=No, REACH SVHC="No SVHC", Stock 1=103885, Supplier 1=Digi-Key, Termination=Solder, USB Standard="USB 2.0", Voltage Rating=100V
L1: library part ASPI-0315FS-100M, "Inductor 10uH 1.1A 0.22ohm 20% 3x3", Manufacturer=Abracon, item_number=E-IND-00043-00, Manufacturer Part Number=ASPI-0315FS-100M
MOD1: "Module WIFI BLE ESP32-D0WD 4MB", Manufacturer=Espressif, item_number=E-ICS-00097-00, Manufacturer Part Number=ESP32-WROOM-32D, Size="25.5mm x 18mm"
Q2: library part Nch_MOSFET_2N7002, "TR MOSFET N-CH 60V 115mA SOT23", Manufacturer="On Semiconductor", Package / Case=SOT23, Commodity=FET, item_number=E-TRS-00003-00, Manufacturer Part Number=2N7002
Q3 Q4: "TR NPN BJT 200mA 40V", Manufacturer="On Semiconductor", Manufacturer Part Number=MMBT3904LT1G, Package/Case=SOT23, ComponentLink1Description="Manufacturer Link", ComponentLink1URL=http://www.fairchildsemi.com/, ComponentLink2Description=Datasheet, ComponentLink2URL=http://www.fairchildsemi.com/ds/2N%2F2N3904.pdf, item_number=E-TRS-00002-00
R6 R17 R18 R19 R20 R22: library part 0402R-100R, "Resistor 100R 50V 5% 0402", Case/Package=0402, Case Code (Metric)=1005, Manufacturer=Panasonic, Manufacturer Part Number=ERJ-2GEJ101X, Max Operating Temperature=155°C, Max Power Dissipation=100mW, Min Operating Temperature=-55°C, Package Quantity=10, Temperature Coefficient=100ppm/°C, Tolerance=5%, Voltage Rating=50V, Case Code (Imperial)=0402, Composition="Thick Film", Contact Plating=Tin, Depth=0.5mm, Features="Automotive AEC-Q200", Height=0.35mm, item_number=E-RES-00008-00, Lead Free="Lead Free", Length=1mm, Military Standard=Not, Mount="Surface Mount", Number of Terminations=2, Packaging="Tape and Reel", Power Rating=100mW, Pricing 1="1=0.1, 10=0.044, 100=0.0178, 1000=0.008, 2500=0.007, 5000=0.0058 (USD)", Radiation Hardening=No, REACH SVHC=Unknown, Resistance=100, Termination=SMD/SMT, Voltage Rating (DC)=50V, Weight=2.3E-05oz, Width=0.02inch, Working Voltage=50V
R7 R8 R31: library part 0402R-4k7, "Resistor 4.7K 50V 5% 0402", Case/Package=0402, Case Code (Metric)=1005, Manufacturer=Panasonic, Manufacturer Part Number=ERJ-2GEJ472X, Max Operating Temperature=155°C, Max Power Dissipation=100mW, Min Operating Temperature=-55°C, Package Quantity=1, Supplier Part Number 1=P4.7KJCT-ND, Temperature Coefficient=200ppm/°C, Tolerance=5%, Voltage Rating=50V, Case Code (Imperial)=0402, ComponentLink1Description=https://datasheet.ciiva.com/11821/0900766b80f806dd-11821328.pdf, ComponentLink1URL=https://datasheet.ciiva.com/11821/0900766b80f806dd-11821328.pdf, ComponentLink2Description=https://datasheet.ciiva.com/16758/70260739-16758341.pdf, ComponentLink2URL=https://datasheet.ciiva.com/16758/70260739-16758341.pdf, ComponentLink3Description=https://datasheet.ciiva.com/16770/70260739-16770309.pdf, ComponentLink3URL=https://datasheet.ciiva.com/16770/70260739-16770309.pdf, ComponentLink4Description=https://datasheet.ciiva.com/28514/1678796-28514168.pdf, ComponentLink4URL=https://datasheet.ciiva.com/28514/1678796-28514168.pdf, ComponentLink5Description=https://datasheet.ciiva.com/17213/aoa0000ce1-17213178.pdf, ComponentLink5URL=https://datasheet.ciiva.com/17213/aoa0000ce1-17213178.pdf, ComponentLink6Description=https://datasheet.ciiva.com/16523/aoa0000ce1-16523499.pdf, ComponentLink6URL=https://datasheet.ciiva.com/16523/aoa0000ce1-16523499.pdf, ComponentLink7Description=https://datasheet.ciiva.com/46377/1678796-46377565.pdf, ComponentLink7URL=https://datasheet.ciiva.com/46377/1678796-46377565.pdf, Composition="Thick Film", Contact Plating=Tin, Depth=0.5mm, Features="Automotive AEC-Q200", Height=0.35mm, item_number=E-RES-00039-00, Lead Free="Lead Free", Length=1mm, Military Standard=Not, Mount="Surface Mount", Number of Terminations=2, Packaging="Cut Tape", Power Rating=100mW, Pricing 1="1=0.1, 10=0.038, 100=0.0154, 1000=0.0069, 2500=0.006, 5000=0.005 (USD)", Radiation Hardening=No, REACH SVHC="No SVHC", Resistance=4.7k, Stock 1=10404054, Supplier 1=Digi-Key, Termination=SMD/SMT, Voltage Rating (DC)=50V, Width=0.5mm
R9 R10: library part 0402R-100k, "Resistor 100K 50V 5% 0402", Case/Package=0402, Case Code (Metric)=1005, Manufacturer=Panasonic, Manufacturer Part Number=ERJ-2GEJ104X, Max Operating Temperature=155°C, Max Power Dissipation=100mW, Min Operating Temperature=-55°C, Package Quantity=1, Supplier Part Number 1=P100KJCT-ND, Temperature Coefficient=200ppm/°C, Tolerance=5%, Voltage Rating=50V, Case Code (Imperial)=0402, ComponentLink1Description=https://datasheet.ciiva.com/11821/0900766b80f806dd-11821174.pdf, ComponentLink1URL=https://datasheet.ciiva.com/11821/0900766b80f806dd-11821174.pdf, ComponentLink2Description=https://datasheet.ciiva.com/22758/1500035-22758198.pdf, ComponentLink2URL=https://datasheet.ciiva.com/22758/1500035-22758198.pdf, ComponentLink3Description=https://datasheet.ciiva.com/34303/1986799-34303543.pdf, ComponentLink3URL=https://datasheet.ciiva.com/34303/1986799-34303543.pdf, ComponentLink4Description=https://datasheet.ciiva.com/24023/aoa0000ce1-37422-24023480.pdf, ComponentLink4URL=https://datasheet.ciiva.com/24023/aoa0000ce1-37422-24023480.pdf, ComponentLink5Description=https://datasheet.ciiva.com/16777/70260739-16777321.pdf, ComponentLink5URL=https://datasheet.ciiva.com/16777/70260739-16777321.pdf, ComponentLink6Description=https://datasheet.ciiva.com/16759/70260739-16759692.pdf, ComponentLink6URL=https://datasheet.ciiva.com/16759/70260739-16759692.pdf, ComponentLink7Description=https://datasheet.ciiva.com/48531/aoa0000ce1-48531084.pdf, ComponentLink7URL=https://datasheet.ciiva.com/48531/aoa0000ce1-48531084.pdf, ComponentLink8Description=https://datasheet.ciiva.com/9186/aoa0000ce1-9186685.pdf, ComponentLink8URL=https://datasheet.ciiva.com/9186/aoa0000ce1-9186685.pdf, ComponentLink9Description=https://datasheet.ciiva.com/30204/4aoa0000ce1-30204557.pdf, ComponentLink9URL=https://datasheet.ciiva.com/30204/4aoa0000ce1-30204557.pdf, ComponentLink10Description=https://datasheet.ciiva.com/46389/1500035-46389645.pdf, ComponentLink10URL=https://datasheet.ciiva.com/46389/1500035-46389645.pdf, Composition="Thick Film", Contact Plating=Tin, Depth=0.5mm, Features="Automotive AEC-Q200", Height=0.35mm, item_number=E-RES-00012-00, Lead Free="Lead Free", Length=1mm, Military Standard=Not, Mount="Surface Mount", Number of Terminations=2, Packaging="Tape and Reel", Power Rating=100mW, Pricing 1="1=0.1, 10=0.038, 100=0.0154, 1000=0.0069, 2500=0.006, 5000=0.005 (USD)", Radiation Hardening=No, REACH SVHC="No SVHC", Resistance=100k, Stock 1=10583442, Supplier 1=Digi-Key, Termination=SMD/SMT, Voltage Rating (DC)=50V, Width=0.02inch
R11 R24: library part 0402R-NS, "Resistor 0402 No Stuff", Case/Package=0402, Case Code (Metric)=1005, Max Operating Temperature=155°C, Min Operating Temperature=-55°C, Tolerance=1%, Case Code (Imperial)=0402, Composition="Thick Film", Contact Plating=Tin,Matte, Height=0.35mm, Lead Free="Lead Free", Length=1mm, Radiation Hardening=No, Termination=SMD/SMT, Width=0.5mm
R12 R13 R28 R29: library part 0402R-10k, "Resistor 10K 50V 5% 0402", Case/Package=0402, Case Code (Metric)=1005, Manufacturer="Vishay Dale", Manufacturer Part Number=CRCW040210K0JNED, Max Operating Temperature=155°C, Max Power Dissipation=63mW, Min Operating Temperature=-55°C, Package Quantity=1, Supplier Part Number 1=541-10KJCT-ND, Temperature Coefficient=200ppm/°C, Tolerance=5%, Voltage Rating=50V, Case Code (Imperial)=0402, ComponentLink1Description=https://datasheet.ciiva.com/2461/dcrcwe3-2461974.pdf, ComponentLink1URL=https://datasheet.ciiva.com/2461/dcrcwe3-2461974.pdf, ComponentLink2Description=https://datasheet.ciiva.com/2461/dcrcwe3-2461975.pdf, ComponentLink2URL=https://datasheet.ciiva.com/2461/dcrcwe3-2461975.pdf, ComponentLink3Description=https://datasheet.ciiva.com/2461/dcrcwe3-2461976.pdf, ComponentLink3URL=https://datasheet.ciiva.com/2461/dcrcwe3-2461976.pdf, ComponentLink4Description=https://datasheet.ciiva.com/7743/dcrcwe3-7743416.pdf, ComponentLink4URL=https://datasheet.ciiva.com/7743/dcrcwe3-7743416.pdf, ComponentLink5Description=https://datasheet.ciiva.com/16771/70201119-16771096.pdf, ComponentLink5URL=https://datasheet.ciiva.com/16771/70201119-16771096.pdf, ComponentLink6Description=https://datasheet.ciiva.com/7743/dcrcwe3-7743417.pdf, ComponentLink6URL=https://datasheet.ciiva.com/7743/dcrcwe3-7743417.pdf, ComponentLink7Description=https://datasheet.ciiva.com/16761/70201119-16761947.pdf, ComponentLink7URL=https://datasheet.ciiva.com/16761/70201119-16761947.pdf, ComponentLink8Description=https://datasheet.ciiva.com/3255/dcrcwe3-3255964.pdf, ComponentLink8URL=https://datasheet.ciiva.com/3255/dcrcwe3-3255964.pdf, ComponentLink9Description=https://datasheet.ciiva.com/3255/dcrcwe3-3255965.pdf, ComponentLink9URL=https://datasheet.ciiva.com/3255/dcrcwe3-3255965.pdf, Composition="Thick Film", Contact Plating=Tin, Depth=0.5mm, Features="Automotive AEC-Q200", Height=0.016inch, item_number=E-RES-00001-00, Length=1mm, Military Standard=Not, Mount="Surface Mount", Number of Terminations=2, Packaging="Tape and Reel", Power Rating=63mW, Pricing 1="1=0.1, 10=0.031, 100=0.0125, 1000=0.0056, 2500=0.0049, 5000=0.004 (USD)", Radiation Hardening=No, REACH SVHC=Unknown, Resistance=10k, Stock 1=0, Supplier 1=Digi-Key, Termination=SMD/SMT, Weight=2.3E-05oz, Width=0.5mm
R15: library part 0402R-200k, "Resistor 200K 50V 1% 0402", Case/Package=0402, Case Code (Metric)=1005, Manufacturer=Panasonic, Manufacturer Part Number=ERJ-2RKF2003X, Max Operating Temperature=155°C, Max Power Dissipation=100mW, Min Operating Temperature=-55°C, Package Quantity=1, Temperature Coefficient=200ppm/°C, Tolerance=1%, Voltage Rating=50V, Case Code (Imperial)=0402, Composition="Thick Film", Contact Plating=Tin, Depth=0.5mm, Features="Automotive AEC-Q200", Height=0.35mm, item_number=E-RES-00054-00, Lead Free="Lead Free", Length=1mm, Military Standard=Not, Mount="Surface Mount", Number of Terminations=2, Packaging="Tape and Reel", Power Rating=100mW, Radiation Hardening=No, REACH SVHC="No SVHC", Resistance=200K, Termination=SMD/SMT, Voltage Rating (DC)=50V, Width=0.02inch
R16: library part 0402R-680k, "Resistor 680K 50V 5% 0402", Case/Package=0402, Case Code (Metric)=1005, Manufacturer=Panasonic, Manufacturer Part Number=ERJ-2GEJ684X, Max Operating Temperature=155°C, Max Power Dissipation=100mW, Min Operating Temperature=-55°C, Package Quantity=1, Supplier Part Number 1=P100KJCT-ND, Temperature Coefficient=200ppm/°C, Tolerance=5%, Voltage Rating=50V, Case Code (Imperial)=0402, Composition="Thick Film", Contact Plating=Tin, Depth=0.5mm, Features="Automotive AEC-Q200", Height=0.35mm, item_number=E-RES-00093-00, Lead Free="Lead Free", Length=1mm, Military Standard=Not, Mount="Surface Mount", Number of Terminations=2, Packaging="Tape and Reel", Power Rating=100mW, Radiation Hardening=No, REACH SVHC="No SVHC", Resistance=680k, Stock 1=10583442, Supplier 1=Digi-Key, Termination=SMD/SMT, Voltage Rating (DC)=50V, Width=0.02inch
R21: library part 0402R-200k, "Resistor 200K 50V 1% 0402", Case/Package=0402, Case Code (Metric)=1005, Manufacturer=Panasonic, Manufacturer Part Number=ERJ-2RKF2003X, Max Operating Temperature=155°C, Max Power Dissipation=100mW, Min Operating Temperature=-55°C, Package Quantity=1, Resistance=200K, Temperature Coefficient=200ppm/°C, Tolerance=1%, Voltage Rating=50V, Case Code (Imperial)=0402, Composition="Thick Film", Contact Plating=Tin, Depth=0.5mm, Features="Automotive AEC-Q200", Height=0.35mm, item_number=E-RES-00054-00, Lead Free="Lead Free", Length=1mm, Military Standard=Not, Mount="Surface Mount", Number of Terminations=2, Packaging="Tape and Reel", Power Rating=100mW, Radiation Hardening=No, REACH SVHC="No SVHC", Termination=SMD/SMT, Voltage Rating (DC)=50V, Width=0.02inch
R23: library part 0402R-0R0, "Resistor 0R 50V 1% 0402", Case/Package=0402, Case Code (Metric)=1005, Manufacturer=Yageo, Manufacturer Part Number=RC0402FR-070RL, Max Operating Temperature=155°C, Min Operating Temperature=-55°C, Power Rating=62.5mW, Resistance=0mR, Supplier Part Number 1=603-RC0402FR-070RL, Temperature Coefficient=200ppm/°C, Tolerance=1%, Voltage Rating=50V, Case Code (Imperial)=0402, ComponentLink1Description=https://datasheet.ciiva.com/8896/pyu-rc0402-51-rohs-l-6-8896149.pdf, ComponentLink1URL=https://datasheet.ciiva.com/8896/pyu-rc0402-51-rohs-l-6-8896149.pdf, ComponentLink2Description=https://datasheet.ciiva.com/16790/pyu-rc0402-51-rohs-l-6-r-16790444.pdf, ComponentLink2URL=https://datasheet.ciiva.com/16790/pyu-rc0402-51-rohs-l-6-r-16790444.pdf, ComponentLink3Description=https://datasheet.ciiva.com/28419/pyu-rc0402-51-rohs-l-6-28419661.pdf, ComponentLink3URL=https://datasheet.ciiva.com/28419/pyu-rc0402-51-rohs-l-6-28419661.pdf, ComponentLink4Description=https://datasheet.ciiva.com/16869/pyu-rc0402-51-rohs-l-6-16869518.pdf, ComponentLink4URL=https://datasheet.ciiva.com/16869/pyu-rc0402-51-rohs-l-6-16869518.pdf, Composition="Thick Film", Contact Plating=Tin,Matte, Height=0.35mm, item_number=E-RES-00006-00, Lead Free="Lead Free", Length=1mm, Packaging="Tape and Reel", Pricing 1="1=0.1, 10=0.01, 50=0.01, 100=0.003, 1000=0.002, 10000=0.002 (USD)", Radiation Hardening=No, Stock 1=240535, Supplier 1=Mouser, Termination=SMD/SMT, Width=0.5mm
R25 R26 R27: library part 0402R-1k, "Resistor 1K 50V 5% 0402", Case/Package=0402, Case Code (Metric)=1005, Manufacturer=Panasonic, Manufacturer Part Number=ERJ-2GEJ102X, Max Operating Temperature=125°C, Max Power Dissipation=100mW, Min Operating Temperature=-55°C, Package Quantity=10000, Temperature Coefficient=50ppm/°C, Tolerance=5%, Voltage Rating=50V, Case Code (Imperial)=0402, Composition="Thin Film", Contact Plating=Tin,Lead,Matte, Depth=0.5mm, Height=0.014inch, item_number=E-RES-00002-00, Lead Free="Lead Free", Length=1mm, Military Standard=Not, Number of Terminations=2, Packaging="Tape and Reel", Power Rating=100mW, Pricing 1="1=0.1, 10=0.076, 100=0.029, 1000=0.0128, 2500=0.011, 5000=0.0099 (USD)", Radiation Hardening=No, Resistance=1k, Termination=SMD/SMT, Voltage Rating (DC)=50V, Width=0.02inch
S1: "SMD Tact Switch", Case/Package=SMD/SMT, Current Rating=50mA, Manufacturer="ITT C&K", Max Operating Temperature=85°C, Max Voltage Rating (DC)=32V, Min Operating Temperature=-40°C, Operating Force=3N, Package Quantity=7000, Power Rating=1W, Supplier Part Number 1=CKN10246CT-ND, Actuator Length=0.5mm, Actuator Type=Standard, ComponentLink1Description=https://www.ckswitches.com/media/1479/kmr2.pdf, ComponentLink1URL=https://www.ckswitches.com/media/1479/kmr2.pdf, ComponentLink2Description=http://www.ck-components.com/14414/kmr2_9aug12.pdf/, ComponentLink2URL=http://www.ck-components.com/14414/kmr2_9aug12.pdf/, Contact Material=Silver, Contact Plating=Silver, Depth=2.8mm, Illumination Type=Non-Illuminated, item_number=E-SWI-00022, Length=2.8mm, Manufacturer Part Number=KMR231NGLFS, Max Current Rating=50mA, Mechanical Life=150000Cycles, Mount="Surface Mount", Orientation=Straight, Packaging="Tape and Reel", Pricing 1="1=0.52, 10=0.499, 25=0.4896, 50=0.4712, 100=0.4065, 250=0.3696, 500=0.3511, 1000=0.2772 (USD)", Radiation Hardening=No, Stock 1=45821, Supplier 1=Digi-Key, Switch Function=Off-Mom, Switch Travel=0.25mm, Termination="Gull Wing", Throw Configuration=SPST, Voltage Rating (DC)=32V
SB1 SB2 SB3 SB4 SB5 SB6 SB7: library part SBNC, "Solderbridge, Normally Closed", Part Number="Solderbridge Shorted", Artikkelnr Noca=N.A., Artikkelnr Simpro=N.A., Footprint Doc=Solderbridge_Shorted, LatestRevisionDate=2012-08-07, Pin Count=2
TP1 TP2 TP3 TP4 TP5 TP6 TP7 TP9 TP10 TP11 TP13 TP14 TP15: "1mm Test Point", item_number=item_name
U1: "Memory SPI/QPI PSRAM 8MB SOIC8 150mil", Manufacturer=IPUS, Manufacturer Part Number=IPS6404L-SQ-SPN, Package / Case="8 SOIC 150mil", item_number=E-ICS-00099-00
U2: "Afero Custom CryptoAuthentication Device", Manufacturer="Microchip / Atmel", Manufacturer Part Number=ATECC508A-MAHKN-T, Max Operating Temperature=85°C, Min Operating Temperature=-40°C, Supplier Part Number 1=ATECC508A-MAHDA-TCT-ND, item_number=E-ICS-00072-00, Mount="Surface Mount", Packaging="Tape and Reel", Pricing 1="1=0.35, 25=0.32, 100=0.29 (USD)", Stock 1=4638, Supplier 1=Digi-Key
U3: "Voltage Regulator 0.5A 500KHz Buck", Manufacturer=Torex, Package / Case=SOT25, item_number=E-ICS-00096-00, Manufacturer Part Number=XC9264B755MR
U4: "USB to UART Bridge", Manufacturer=SiLabs, Manufacturer Part Number=CP2104-F03-GM, item_number=E-ICS-00098-00
X1: library part ABS06-32.768KHZ-T, "Crystal, 32.768kHz ±20ppm", Case/Package=SMD/SMT, ESR (Equivalent Series Resistance)=90kR, Frequency Stability=20ppm, Insulation Resistance=500MR, Load Capacitance=12.5pF, Manufacturer=Abracon, Max Operating Temperature=85°C, Min Operating Temperature=-40°C, Package Quantity=3000, Supplier Part Number 1=535-10104-1-ND, ComponentLink1Description=http://www.farnell.com/datasheets/1796520.pdf, ComponentLink1URL=http://www.farnell.com/datasheets/1796520.pdf, ComponentLink2Description=https://abracon.com/Support/PackageDrawing/Resonators/ABS06.PDF, ComponentLink2URL=https://abracon.com/Support/PackageDrawing/Resonators/ABS06.PDF, ComponentLink3Description=http://www.farnell.com/datasheets/1912788.pdf, ComponentLink3URL=http://www.farnell.com/datasheets/1912788.pdf, ComponentLink4Description=http://www.abracon.com/Resonators/ABS06.pdf, ComponentLink4URL=http://www.abracon.com/Resonators/ABS06.pdf, Depth=1.2mm, Frequency=32.768kHz, Frequency Tolerance=20ppm, Height=0.024inch, item_number=E-XTL-00012-00, Lead Free="Lead Free", Length=2mm, Manufacturer Part Number=ABS06-32.768KHZ-T, Mount="Surface Mount", Number of Pins=2, Packaging="Tape and Reel", Pricing 1="1=1.34, 10=1.277, 50=1.2474, 100=1.0692, 500=1.0395, 1000=0.8762 (USD)", Radiation Hardening=No, REACH SVHC="No SVHC", Series Resistance=90kR, Stock 1=65982, Supplier 1=Digi-Key, Termination=SMD/SMT, Tolerance=20ppm, Width=1.2mm

## Via types
v1: diameter 18, hole 10, Top Layer to Bottom Layer, tented both sides, 130 vias

## Nets (pads, with @x,y where several pads share a name; then routed paths per layer and width w, separated by ;. In a path a pad name is that pad's centre, name@x,y a point inside that pad or via, vN(x,y) a via of type N, cw(c..) or ccw(c..) an arc to the next point about the centre after c; other vN are vias at no path point)
3V3: C1.1 C3.1 C5.1 C7.1 C12.1 C13.1 D2.1 J3.15 J4.1 MOD1.2 R7.1 R8.1 R9.1 R10.1 R12.2 R13.1 R24.1 R27.2 SB3.1 TP2.1 U1.8 U2.8 | length 3893.7
  Top Layer w8: R7.1@920.89,-181.83 R7.1@927.72,-175 ; C3.1@928.11,-255 930.08,-255 C3.1@936.71,-261.63 ; U2.8@950.87,-290.47 U2.8@961.69,-290.47
  Top Layer w10: R27.2@150,-192.28 150,-190 R27.2@150.39,-190.39 ; R27.2@150.39,-188 v1@245,-188 ; R24.1@245,-168.11 v1@245,-188 ; J4.1@335,-295 305.31,-265.31 305.31,-235.61 283.47,-213.77 268.38,-213.77 v1(245,-190.39) v1@245,-188 ; v1(552.28,265) v1@554.45,265 ; v1(595.63,-283.13) v1@596.26,-282.5 ; C5.1@596.26,-260.63 C5.1@596.89,-260 ; R12.2@677.28,210.43 691.89,195.83 692.25,195.83 698.11,189.97 698.11,189.61 R13.1@712.72,175 ; C13.1@893.89,135 896.53,135 C13.1@902.16,129.37 ; U1.8@902.16,76.29 908.46,70 U1.8@912.28,70 ; R7.1@920.89,-181.83 920.89,-182.19 892.28,-210.79 R8.1@892.28,-215 892.28,-218.02 914.49,-240.23 914.49,-241.38 C3.1@928.11,-255 ; C3.1@936.71,-261.63 936.71,-276.31 U2.8@950.87,-290.47 ; MOD1.2@1654.64,334.65 MOD1.2@1655,334.28
  Top Layer w12: v1@552.28,285 602.28,335 R10.1@677.28,335 ; v1@554.45,265 564.45,255 R9.1@677.28,255 R12.2@677.28,210.43 ; D2.1@595.63,-305 v1(595.63,-283.13) ; v1@596.26,-282.5 C5.1@596.26,-260.63 ; R13.1@712.72,175 752.72,135 C13.1@893.89,135 ; v1(870,-215) R8.1@892.28,-215 ; U1.8@902.16,76.29 C13.1@902.16,129.37
  Top Layer w24: v1@1655,270 v1@1655,290 ; v1(1655,295) MOD1.2@1655,334.28
  Signal Layer 2 w8: J3.15@335,-385 J3.15@350,-400
  Signal Layer 2 w24: J3.15@335,-385 J4.1@335,-295 ; J3.15@350,-400 400.47,-349.53 575.47,-349.53 595.63,-329.37 v1(595.63,-283.13) 595.63,-240.41 525,-169.78 525,135 ; v1@552.28,286.78 v1(552.28,265) 525,237.72 525,135 ; v1@1655,300 1655,255 1495,95 690,95 650,135 525,135
  Bottom Layer w8: TP2.1@1650,240 TP2.1@1655,245 ; v1(1655,275) v1(1655,295)
  Bottom Layer w10: v1@869.49,-215 v1(870,-215)
  Bottom Layer w12: v1(595.63,-283.13) 663.76,-215 v1@869.49,-215
  Bottom Layer w24: TP2.1@1655,245 v1@1655,300
  other v1: 552.28,288.08
3V3_O: C6.1 C8.1 L1.2 R16.2 SB3.2
  other v1: 460,155 460,175 395,310 415,310
BM_SEL: MOD1.25 Q4.3 TP15.1 | length 844.6
  Top Layer w8: v1(600,103.69) 600,152 Q4.3@603,155 ; v1@1027.16,-325 1036.81,-334.65 MOD1.25@1054.64,-334.65
  Signal Layer 2 w8: v1(600,103.69) 616.14,103.69 692.83,27 847.57,27 928.11,-53.54 928.11,-227.22 v1(1023.75,-322.86)
  Bottom Layer w8: TP15.1@1008,-271 1008,-307.11 v1(1023.75,-322.86)
DEBUG_UART_CTS: MOD1.6 TP9.1 | length 98.9
  Top Layer w8: MOD1.6@1454.64,334.65 1455,334.28 v1(1455,290)
  Bottom Layer w8: TP9.1@1445,240 1455,250 v1(1455,290)
DEBUG_UART_RX: MOD1.34 R25.1 TP3.1 | length 1544.7
  Top Layer w8: R25.1@490,172.72 512.28,195 v1(560,195) ; MOD1.34@1504.64,-334.65 v1(1504.64,-300)
  Signal Layer 2 w8: v1(560,195) 814.11,195 872.11,137 v1(1175,137) ; v1(1206.26,-295) 1211.26,-300 1349.3,-300 ; 1349.33,-300.03 1364.24,-300.03 ; 1364.27,-300 v1(1504.64,-300)
  Bottom Layer w8: v1(1175,137) 1188.26,123.74 1188,123.49 1188,-277 1206,-295 v1(1206.26,-295) ; TP3.1@1495,-258 1504.64,-267.64 v1(1504.64,-300)
DEBUG_UART_TX: MOD1.35 R26.1 TP4.1 | length 1529.5
  Top Layer w8: R26.1@525,172.72 527.15,170.57 v1(560,170.57) ; v1(1546.78,-295) 1546.78,-311.78 1554.64,-319.64 MOD1.35@1554.64,-334.65
  Signal Layer 2 w8: v1(560,170.57) 820.16,170.57 871.73,119 v1@1200.26,119 ; v1@1208.5,-269.5 1214.38,-263.62 1515.4,-263.62 v1(1546.78,-295)
  Bottom Layer w8: v1(1206.26,122) 1206.26,-258.26 1206,-258.51 1210,-262.51 v1@1210,-265 ; v1(1546.78,-295) 1570,-271.78 TP4.1@1570,-258
  other v1: 1206,-265
EN: C11.1 J2.2 R15.2 U3.3 | length 708.7
  Top Layer w8: R15.2@157.83,192.6 192.83,192.6 C11.1@197.83,197.6 v1(215,197.6) U3.3@245.67,197.6
  Signal Layer 2 w8: v1(215,197.6) 346.4,329 532.25,329 556.25,353 689.22,353 736.22,400 J2.2@750,400